# Altium PCB rev1_0.PcbDoc (part 1 of 2)
Units mm, origin at the board's own origin, x right, y up, seen from the top; angles counter-clockwise.
Board outline 99 x 99 mm, 2 copper layers (Top Layer, Bottom Layer); 120 components, 97 nets, 460 pads, 103 vias.
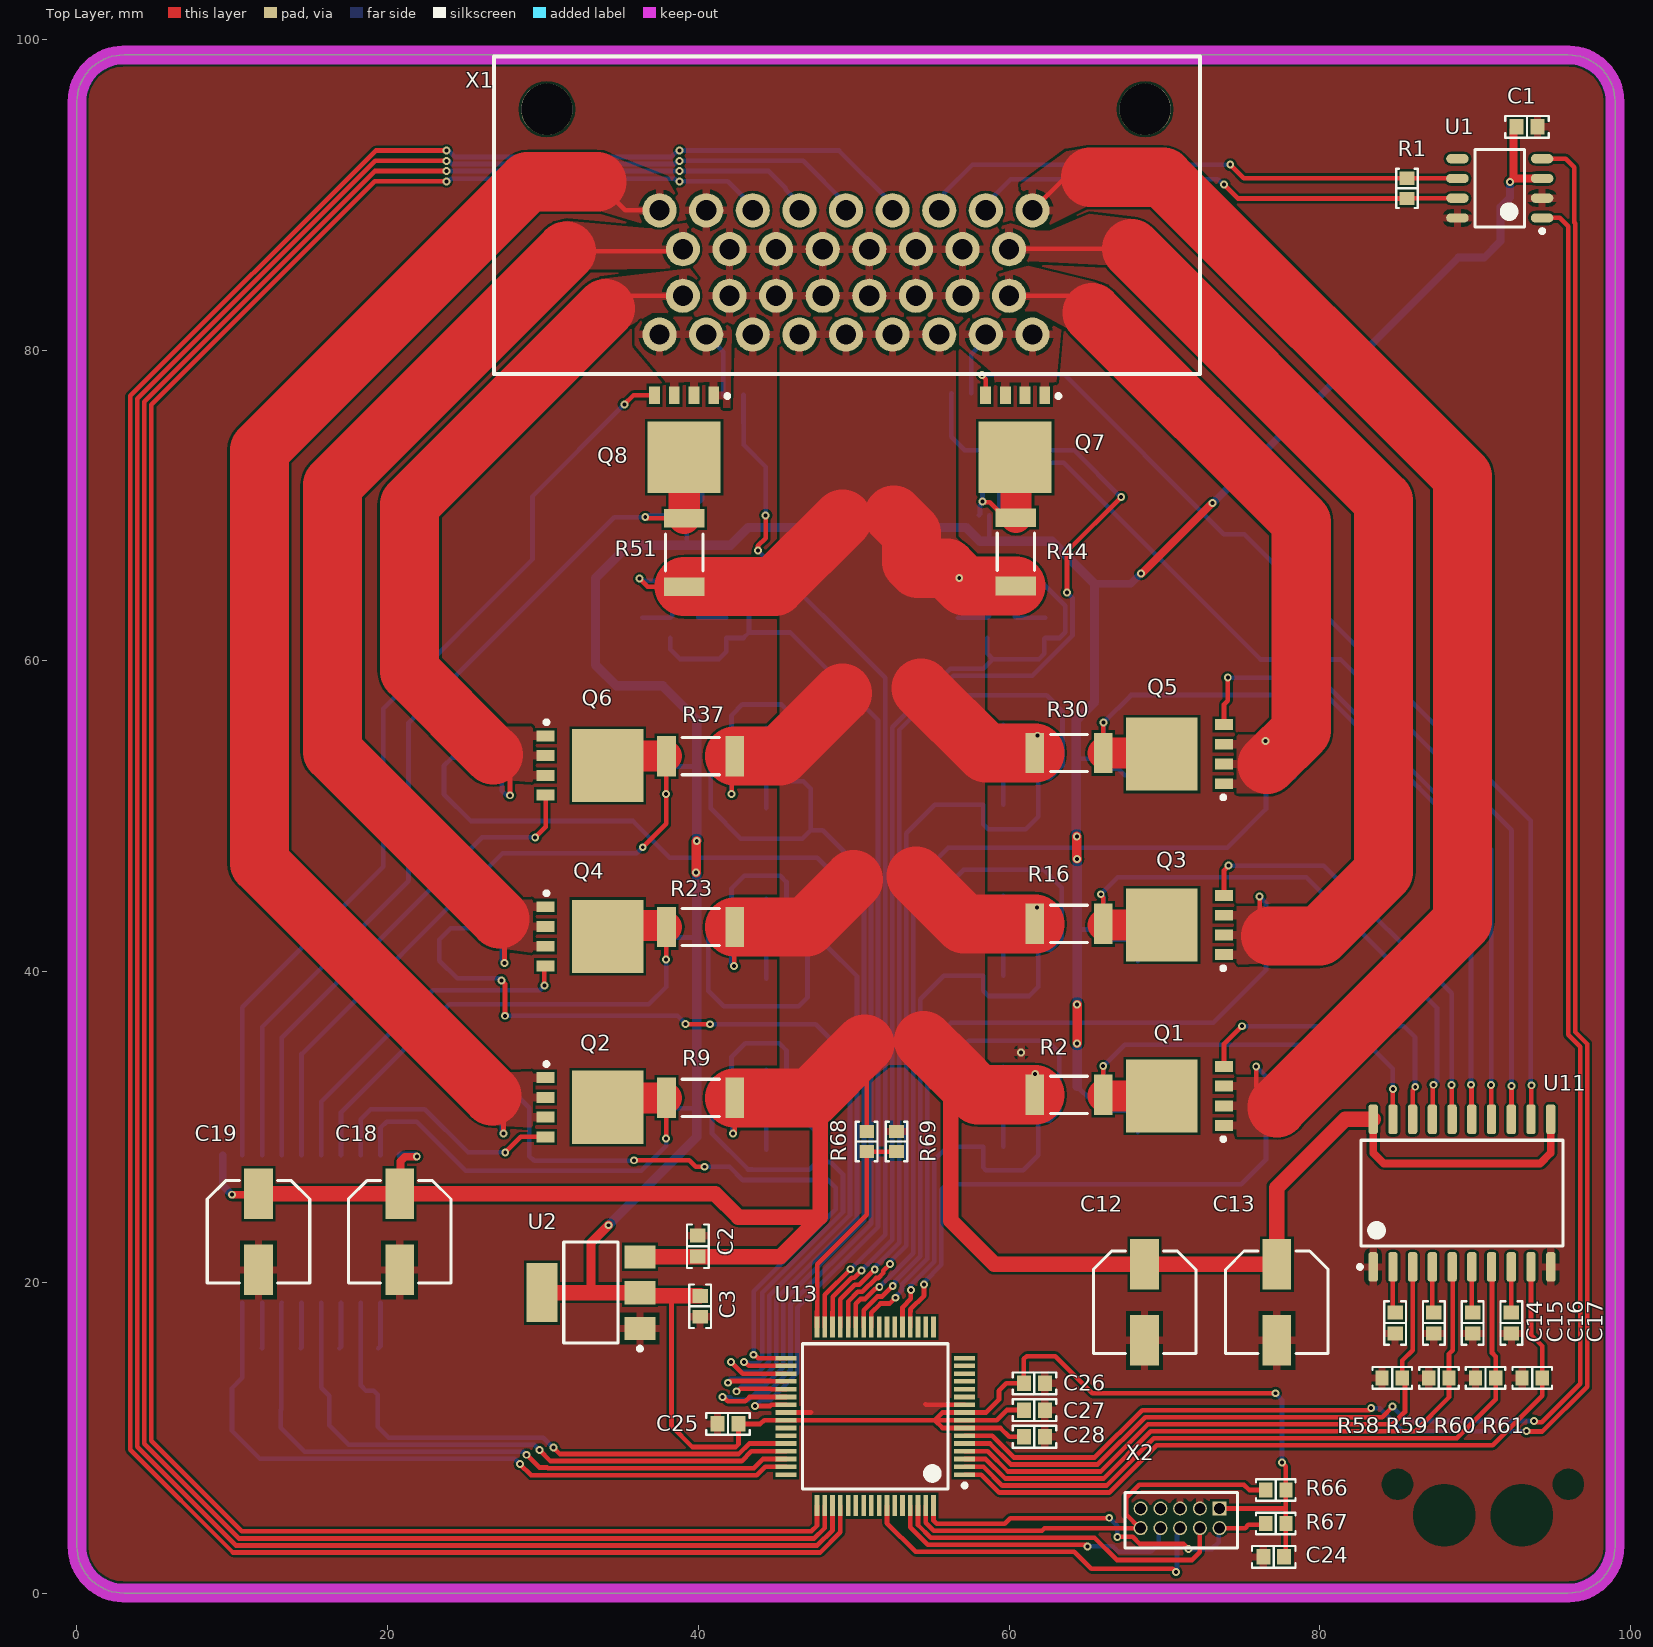
[diagram p0: Top Layer view]
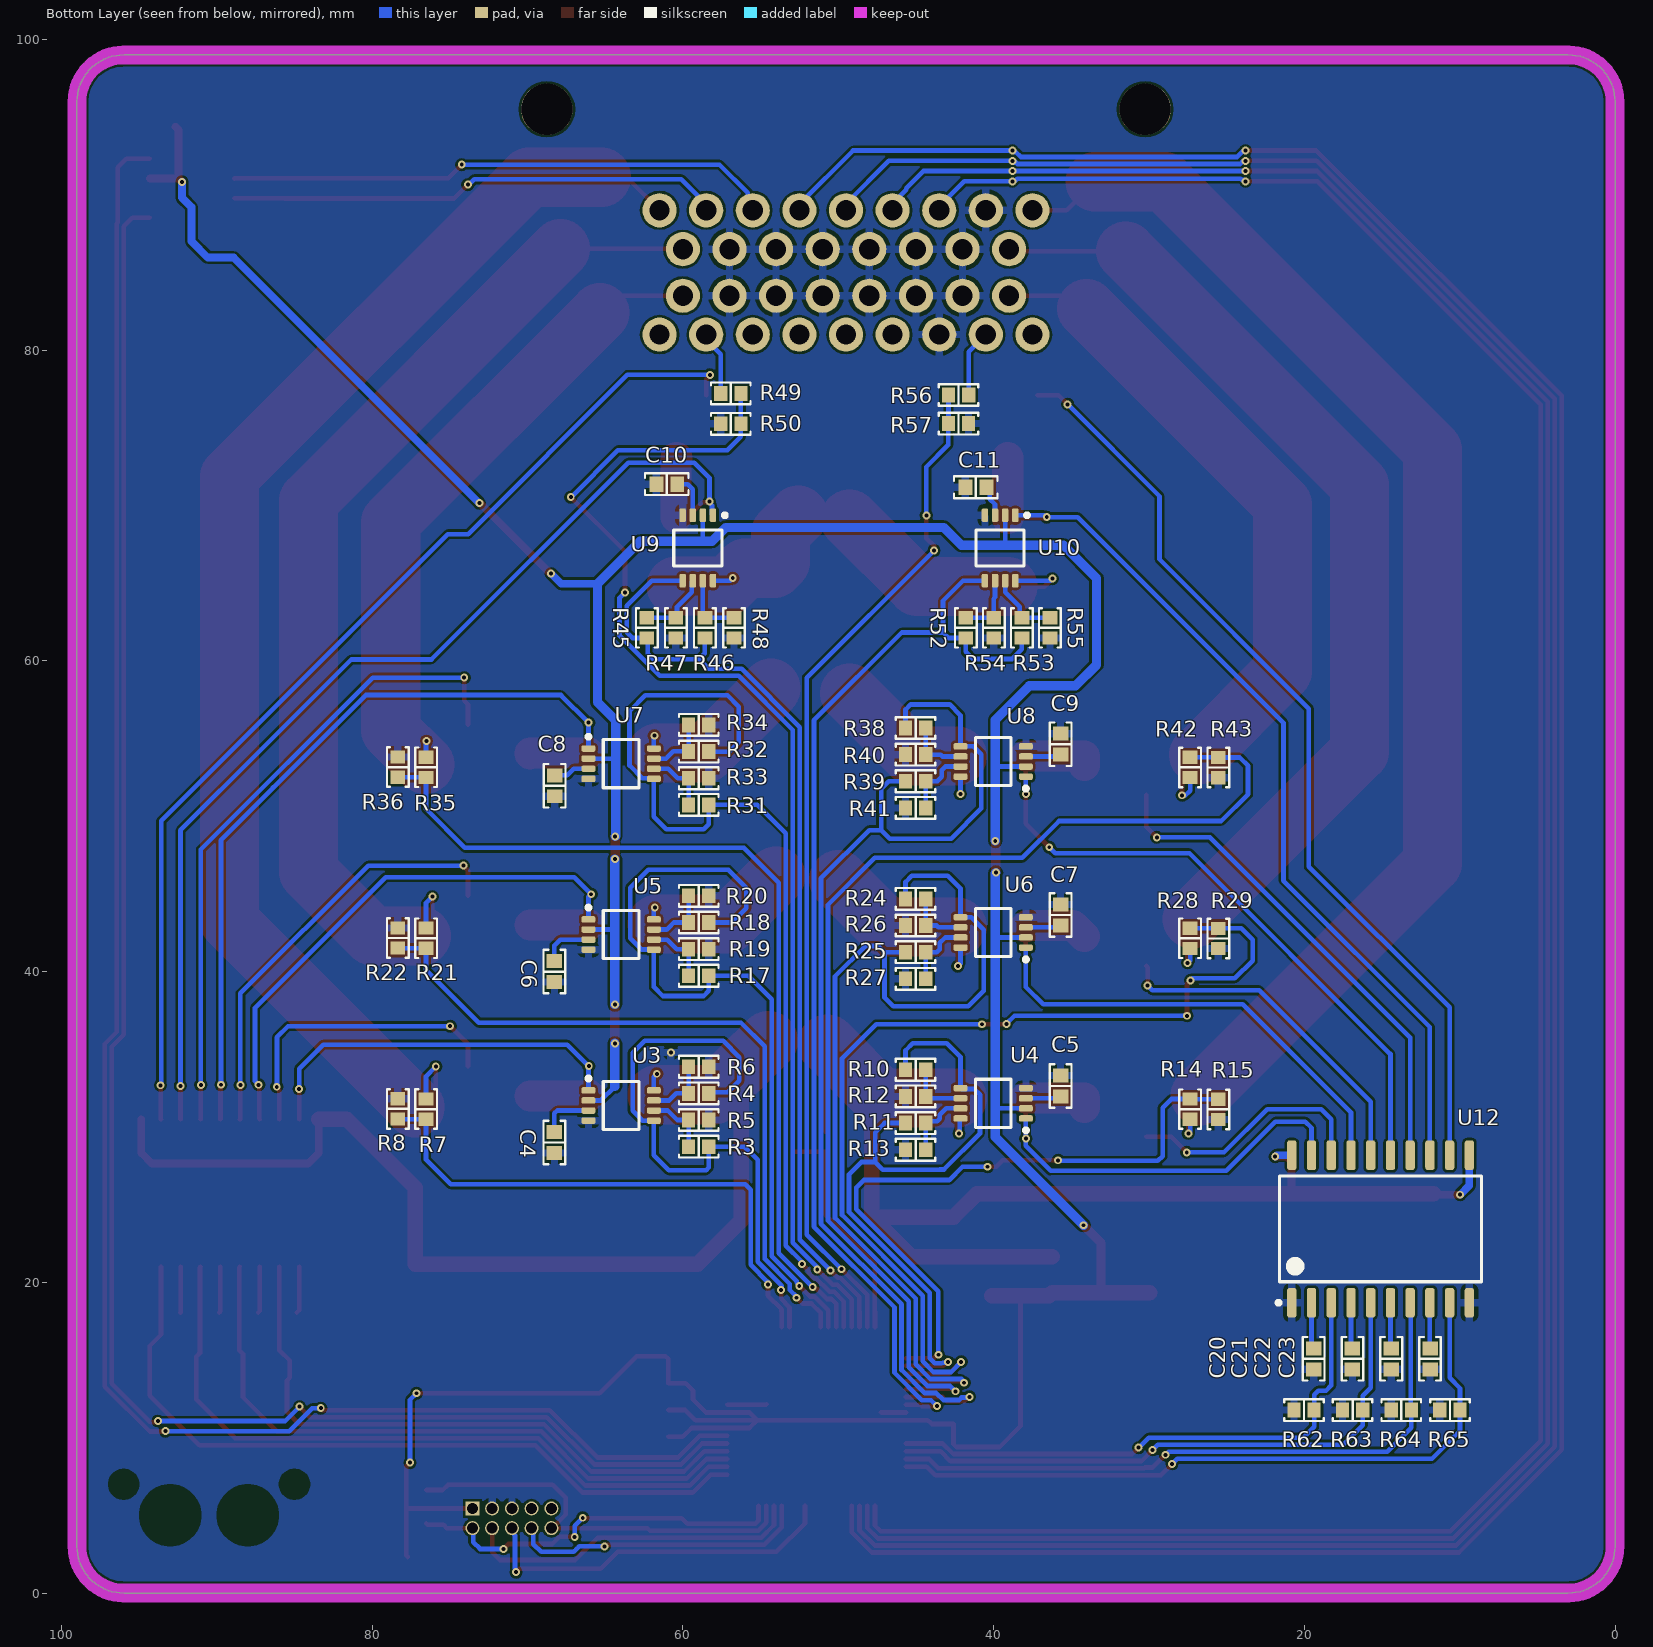
[diagram p1: Bottom Layer view, seen from below]
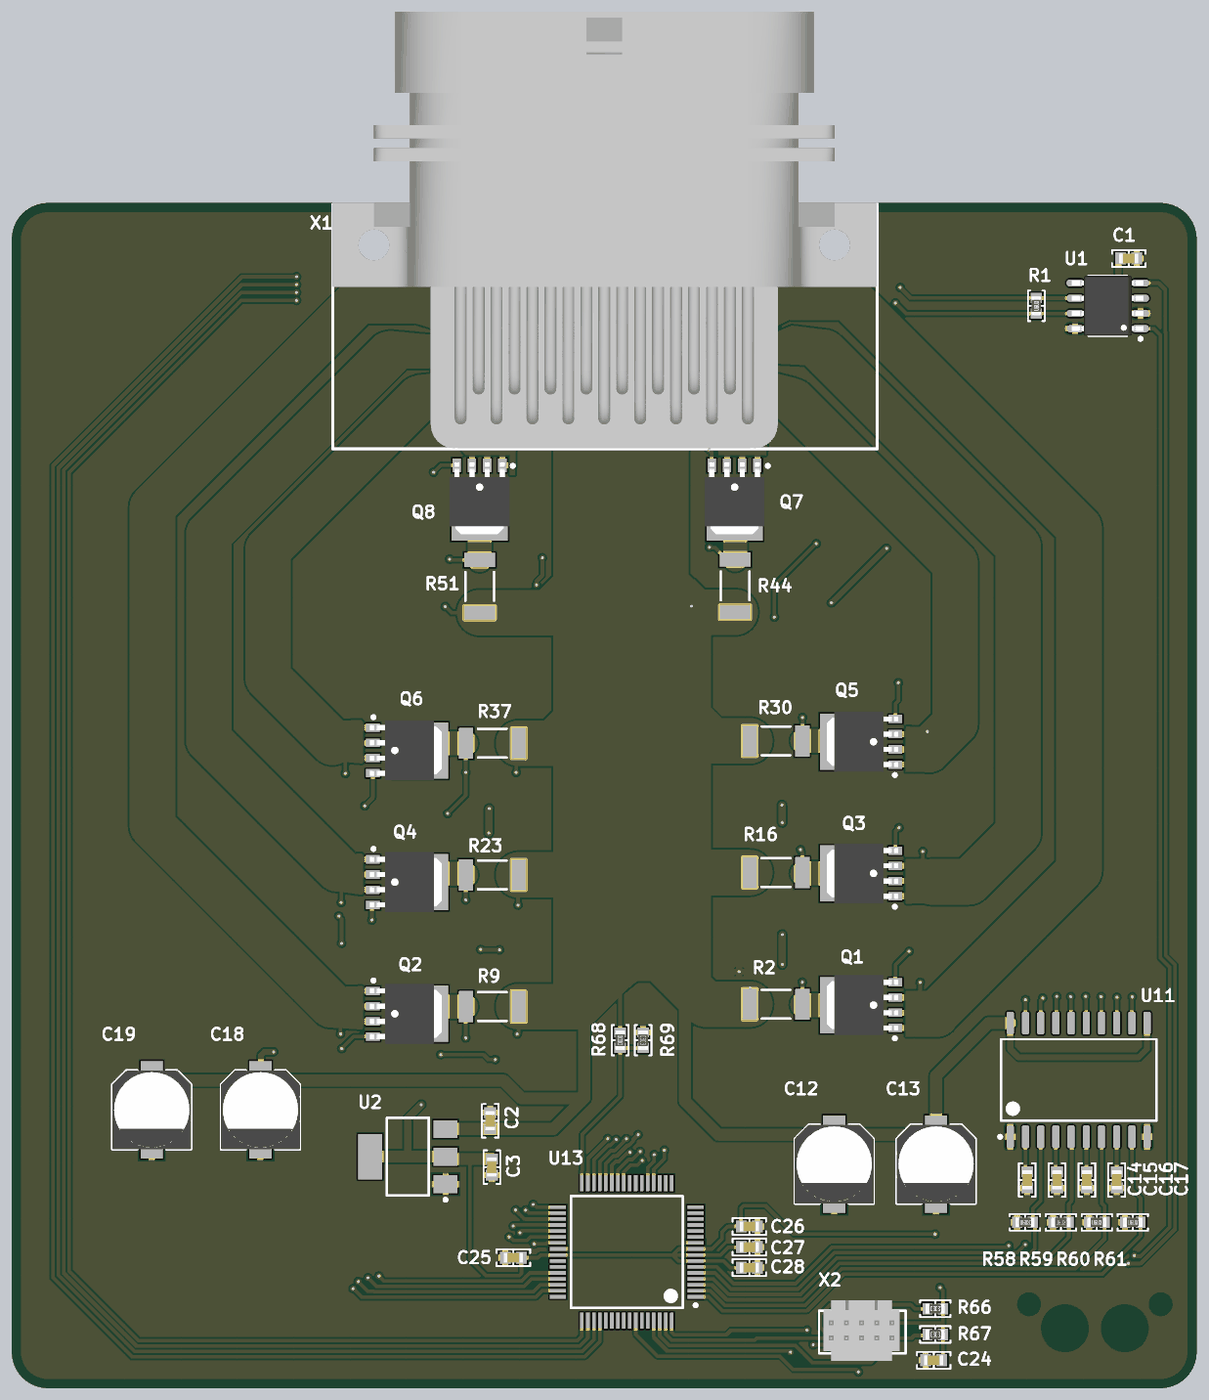
[diagram p3: 3D render of the assembled board from above, using the file's embedded part models]
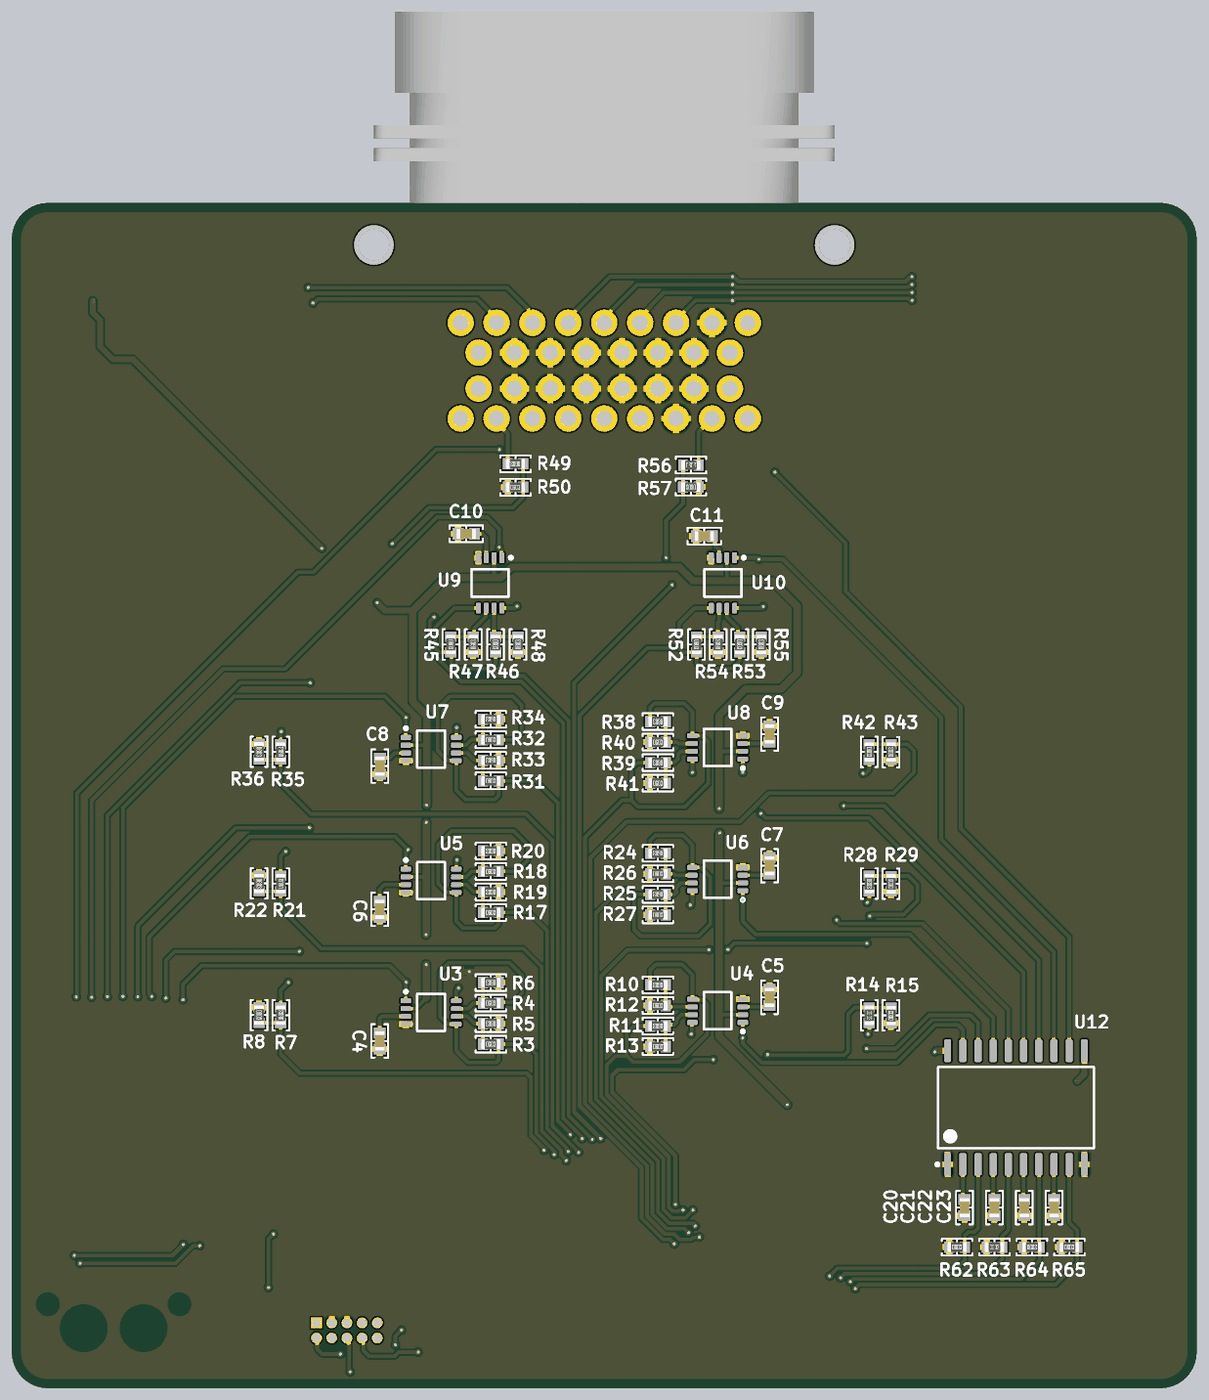
[diagram p4: 3D render of the assembled board from below, using the file's embedded part models]

## Layer stack, top to bottom
Top Solder: solder mask 0.0102, Solder Resist, Dk 3.5
Top Layer: signal copper 0.0356
Dielectric 1: dielectric 0.32, FR-4, Dk 4.8
Bottom Layer: signal copper 0.0356
Bottom Solder: solder mask 0.0102, Solder Resist, Dk 3.5

## Board outline
0,3 0,96 cw(c3,96) 3,99 96,99 cw(c96,96) 99,96 99,3 cw(c96,3) 96,0 3,0 cw(c3,3)

## Design rules (kind name [scope] priority, off if disabled: settings)
Clearance [InNetClass('All Nets')] p1: gap=0.152 ignorepadtopadclearanceinfootprint=FALSE
ComponentClearance [All] p1: gap=0.254 collisioncheckmode=3 verticalgap=2540 showdistances=FALSE
FabricationTestPointUsage TestPointUsage [All] p1: valid=0 allowmultiple=FALSE
FabricationTestpoint Testpoint [All] p1: side=3 testpointundercomponent=TRUE minsize=1.016 maxsize=2.54 preferedsize=1.524 minholesize=0.508 maxholesize=1.016 preferedholesize=0.813 testpointgrid=0.025 allowsidetop=TRUE allowsidebottom=TRUE usegrid=TRUE gridtolerance=0
Height [All] p1: minheight=0 maxheight=100 prefheight=12.7
HoleSize [All] p1: absolutevalues=TRUE maxlimit=6.274 minlimit=0.254 maxpercent=80.000 minpercent=20.000
PasteMaskExpansion PasteMaskExpansion_1 [InComponent('P1')] p1: expansion=-3.81
PasteMaskExpansion [All] p2: expansion=0
PlaneClearance [All] p1: clearance=0.127
PlaneConnect [All] p1: planeconnectstyle=Relief reliefexpansion=0.381 reliefentries=4 reliefconductorwidth=0.254 reliefairgap=0.254
PolygonConnect [All] p1: connectstyle=Relief reliefconductorwidth=0.5 reliefentries=4 polygonreliefangle="90 Angle" airgapwidth=0.254
RoomDefinition Switch42 [InComponentClass('Switch42')] p1 off: confinementstyle=ConfineIn formatcopy=TRUE lockcomponents=FALSE outline 29.832,57.552 48.73,57.552 48.73,82.185 29.832,82.185
RoomDefinition Switch41 [InComponentClass('Switch41')] p2 off: confinementstyle=ConfineIn formatcopy=TRUE lockcomponents=FALSE outline 54.545,58.855 75.835,58.855 75.835,82.279 54.545,82.279
RoomDefinition Switch32 [InComponentClass('Switch32')] p3 off: confinementstyle=ConfineIn formatcopy=TRUE lockcomponents=FALSE outline 23,47.192 49.041,47.192 49.041,58 23,58
RoomDefinition Switch31 [InComponentClass('Switch31')] p4 off: confinementstyle=ConfineIn formatcopy=TRUE lockcomponents=FALSE outline 81,57.808 54.959,57.808 54.959,47 81,47
RoomDefinition Switch22 [InComponentClass('Switch22')] p5 off: confinementstyle=ConfineIn formatcopy=TRUE lockcomponents=FALSE outline 23,36.192 49.041,36.192 49.041,47 23,47
RoomDefinition Switch21 [InComponentClass('Switch21')] p6 off: confinementstyle=ConfineIn formatcopy=TRUE lockcomponents=FALSE outline 81,46.808 54.959,46.808 54.959,36 81,36
RoomDefinition Switch12 [InComponentClass('Switch12')] p7 off: confinementstyle=ConfineIn formatcopy=TRUE lockcomponents=FALSE outline 23,25.192 49.041,25.192 49.041,36 23,36
RoomDefinition Switch11 [InComponentClass('Switch11')] p8 off: confinementstyle=ConfineIn formatcopy=TRUE lockcomponents=FALSE outline 81,35.808 54.959,35.808 54.959,25 81,25
RoomDefinition RightSwitches [InComponentClass('RightSwitches')] p9 off: confinementstyle=ConfineIn formatcopy=TRUE lockcomponents=FALSE outline 3.48,1.377 42.188,1.377 42.188,40.084 3.48,40.084
RoomDefinition LeftSwitches [InComponentClass('LeftSwitches')] p10 off: confinementstyle=ConfineIn formatcopy=TRUE lockcomponents=FALSE outline 63.727,4.837 102.435,4.837 102.435,43.545 63.727,43.545
RoutingVias [All] p1: holewidth=0.381 width=0.762 viastyle="Through Hole" minholewidth=0.254 minwidth=0.508 maxholewidth=0.381 maxwidth=1.27
SilkToSolderMaskClearance SilkscreenOverComponentPads [IsPad] p1: minsilkscreentomaskgap=0.254 clearancetoexposedcopper=TRUE
SolderMaskExpansion [All] p1: expansion=0.127 istentingtop=FALSE
UnRoutedNet [All] p1: checkbadconnections=TRUE
Width [All] p1: maxlimit=3.81 minlimit=0.152 preferedwidth=0.254
20 further rules are at their usual default settings.

## Classes and differential pairs
channel class switches: LeftSwitches RightSwitches
channel class switch: Switch11 Switch12 Switch21 Switch22 Switch31 Switch32 Switch41 Switch42
component class Switch42: C11 Q8 R51 R52 R53 R54 R55 R56 R57 U10
component class Switch41: C10 Q7 R44 R45 R46 R47 R48 R49 R50 U9
component class Switch32: C9 Q6 R37 R38 R39 R40 R41 R42 R43 U8
component class Switch31: C8 Q5 R30 R31 R32 R33 R34 R35 R36 U7
component class Switch22: C7 Q4 R23 R24 R25 R26 R27 R28 R29 U6
component class Switch21: C6 Q3 R16 R17 R18 R19 R20 R21 R22 U5
component class Switch12: C5 Q2 R9 R10 R11 R12 R13 R14 R15 U4
component class Switch11: C4 Q1 R2 R3 R4 R5 R6 R7 R8 U3
component class RightSwitches: C18 C19 C20 C21 C22 C23 R62 R63 R64 R65 U12
component class LeftSwitches: C12 C13 C14 C15 C16 C17 R58 R59 R60 R61 U11

## Components (designator, comment, footprint, x,y, rotation, side; value= is the part's Value field where it differs from the comment)
C1 "Capacitor" 0603_CAP 93.334,94.372 r0 top value=.1u (schematic designator C15)
C2 "Capacitor" 0603_CAP 39.97,22.326 r270 top value=1u (schematic designator C6)
C3 "Capacitor" 0603_CAP 40.108,18.459 r90 top value=1u (schematic designator C7)
C4 "Capacitor" 0603_CAP 68.269,28.999 r90 bottom value=220p (schematic designator C5)
C5 "Capacitor" 0603_CAP 35.688,32.638 r270 bottom value=220p
C6 "Capacitor" 0603_CAP 68.269,39.999 r90 bottom value=220p (schematic designator C5)
C7 "Capacitor" 0603_CAP 35.688,43.638 r270 bottom value=220p (schematic designator C5)
C8 "Capacitor" 0603_CAP 68.25,51.962 r90 bottom value=220p (schematic designator C5)
C9 "Capacitor" 0603_CAP 35.688,54.638 r270 bottom value=220p (schematic designator C5)
C10 "Capacitor" 0603_CAP 61.037,71.373 r180 bottom value=220p (schematic designator C5)
C11 "Capacitor" 0603_CAP 41.144,71.174 r180 bottom value=220p (schematic designator C5)
C12 "UWT1H470MCL1GS" CAPAE6666X77M 68.719,18.715 r270 top value=47u (schematic designator C13)
C13 "UWT1H470MCL1GS" CAPAE6666X77M 77.232,18.714 r270 top value=47u (schematic designator C14)
C14 "Capacitor" 0603_CAP 84.844,17.384 r90 top value=.1u (schematic designator C1)
C15 "Capacitor" 0603_CAP 87.34,17.384 r90 top value=.1u (schematic designator C2)
C16 "Capacitor" 0603_CAP 89.835,17.384 r90 top value=.1u (schematic designator C3)
C17 "Capacitor" 0603_CAP 92.331,17.384 r90 top value=.1u (schematic designator C4)
C18 "UWT1H470MCL1GS" CAPAE6666X77M 20.77,23.247 r270 top value=47u (schematic designator C13)
C19 "UWT1H470MCL1GS" CAPAE6666X77M 11.683,23.247 r270 top value=47u (schematic designator C14)
C20 "Capacitor" 0603_CAP 19.396,15.077 r90 bottom value=.1u (schematic designator C1)
C21 "Capacitor" 0603_CAP 16.9,15.077 r90 bottom value=.1u (schematic designator C2)
C22 "Capacitor" 0603_CAP 14.404,15.077 r90 bottom value=.1u (schematic designator C3)
C23 "Capacitor" 0603_CAP 11.909,15.077 r90 bottom value=.1u (schematic designator C4)
C24 "Capacitor" 0603_CAP 77.033,2.324 r0 top value=.1u (schematic designator C8)
C25 "Capacitor" 0603_CAP 41.906,10.885 r0 top value=.1u (schematic designator C9)
C26 "Capacitor" 0603_CAP 61.623,13.496 r180 top value=.1u (schematic designator C10)
C27 "Capacitor" 0603_CAP 61.623,11.777 r180 top value=.1u (schematic designator C11)
C28 "Capacitor" 0603_CAP 61.623,10.059 r180 top value=.1u (schematic designator C12)
Q1 "PSMN2R2-25YLC" LFPAK-SO8 71.134,31.994 r180 top
Q2 "PSMN2R2-25YLC" LFPAK-SO8 32.866,31.268 r0 top (schematic designator Q1)
Q3 "PSMN2R2-25YLC" LFPAK-SO8 71.134,42.994 r180 top (schematic designator Q1)
Q4 "PSMN2R2-25YLC" LFPAK-SO8 32.866,42.268 r0 top (schematic designator Q1)
Q5 "PSMN2R2-25YLC" LFPAK-SO8 71.134,53.994 r180 top (schematic designator Q1)
Q6 "PSMN2R2-25YLC" LFPAK-SO8 32.866,53.268 r0 top (schematic designator Q1)
Q7 "PSMN2R2-25YLC" LFPAK-SO8 60.391,74.397 r270 top (schematic designator Q1)
Q8 "PSMN2R2-25YLC" LFPAK-SO8 39.083,74.397 r270 top (schematic designator Q1)
R1 "Resistor" 0603_RES 85.607,90.416 r90 top value=120 (schematic designator R12)
R2 "Resistor" 2010 63.856,32.067 r180 top value=0 (schematic designator R5)
R3 "Resistor" 0603_RES 58.982,28.73 r180 bottom value=0 (schematic designator R6)
R4 "Resistor" 0603_RES 58.982,32.161 r180 bottom value=0 (schematic designator R7)
R5 "Resistor" 0603_RES 58.982,30.446 r0 bottom value=0 (schematic designator R8)
R6 "Resistor" 0603_RES 58.982,33.877 r0 bottom value=0 (schematic designator R9)
R7 "Resistor" 0603_RES 76.53,31.149 r90 bottom value=22k (schematic designator R10)
R8 "Resistor" 0603_RES 78.346,31.163 r270 bottom value=10k (schematic designator R11)
R9 "Resistor" 2010 40.144,31.871 r0 top value=0 (schematic designator R5)
R10 "Resistor" 0603_RES 45.018,33.681 r0 bottom value=0 (schematic designator R6)
R11 "Resistor" 0603_RES 45.018,30.25 r0 bottom value=0 (schematic designator R7)
R12 "Resistor" 0603_RES 45.018,31.965 r180 bottom value=0 (schematic designator R8)
R13 "Resistor" 0603_RES 45.018,28.534 r180 bottom value=0 (schematic designator R9)
R14 "Resistor" 0603_RES 27.352,31.145 r270 bottom value=22k (schematic designator R10)
R15 "Resistor" 0603_RES 25.536,31.131 r90 bottom value=10k (schematic designator R11)
R16 "Resistor" 2010 63.856,43.067 r180 top value=0 (schematic designator R5)
R17 "Resistor" 0603_RES 58.982,39.73 r180 bottom value=0 (schematic designator R6)
R18 "Resistor" 0603_RES 58.982,43.161 r180 bottom value=0 (schematic designator R7)
R19 "Resistor" 0603_RES 58.982,41.446 r0 bottom value=0 (schematic designator R8)
R20 "Resistor" 0603_RES 58.982,44.877 r0 bottom value=0 (schematic designator R9)
R21 "Resistor" 0603_RES 76.53,42.149 r90 bottom value=22k (schematic designator R10)
R22 "Resistor" 0603_RES 78.346,42.163 r270 bottom value=10k (schematic designator R11)
R23 "Resistor" 2010 40.144,42.871 r0 top value=0 (schematic designator R5)
R24 "Resistor" 0603_RES 45.018,44.681 r0 bottom value=0 (schematic designator R6)
R25 "Resistor" 0603_RES 45.018,41.25 r0 bottom value=0 (schematic designator R7)
R26 "Resistor" 0603_RES 45.018,42.965 r180 bottom value=0 (schematic designator R8)
R27 "Resistor" 0603_RES 45.018,39.534 r180 bottom value=0 (schematic designator R9)
R28 "Resistor" 0603_RES 27.352,42.145 r270 bottom value=22k (schematic designator R10)
R29 "Resistor" 0603_RES 25.536,42.131 r90 bottom value=10k (schematic designator R11)
R30 "Resistor" 2010 63.856,54.067 r180 top value=0 (schematic designator R5)
R31 "Resistor" 0603_RES 58.982,50.73 r180 bottom value=0 (schematic designator R6)
R32 "Resistor" 0603_RES 58.982,54.161 r180 bottom value=0 (schematic designator R7)
R33 "Resistor" 0603_RES 58.982,52.446 r0 bottom value=0 (schematic designator R8)
R34 "Resistor" 0603_RES 58.982,55.877 r0 bottom value=0 (schematic designator R9)
R35 "Resistor" 0603_RES 76.53,53.149 r90 bottom value=22k (schematic designator R10)
R36 "Resistor" 0603_RES 78.346,53.163 r270 bottom value=10k (schematic designator R11)
R37 "Resistor" 2010 40.144,53.871 r0 top value=0 (schematic designator R5)
R38 "Resistor" 0603_RES 45.018,55.681 r0 bottom value=0 (schematic designator R6)
R39 "Resistor" 0603_RES 45.018,52.25 r0 bottom value=0 (schematic designator R7)
R40 "Resistor" 0603_RES 45.018,53.965 r180 bottom value=0 (schematic designator R8)
R41 "Resistor" 0603_RES 45.018,50.534 r180 bottom value=0 (schematic designator R9)
R42 "Resistor" 0603_RES 27.352,53.145 r270 bottom value=22k (schematic designator R10)
R43 "Resistor" 0603_RES 25.536,53.131 r90 bottom value=10k (schematic designator R11)
R44 "Resistor" 2010 60.439,67.017 r270 top value=0 (schematic designator R5)
R45 "Resistor" 0603_RES 62.322,62.125 r270 bottom value=0 (schematic designator R6)
R46 "Resistor" 0603_RES 58.581,62.125 r270 bottom value=0 (schematic designator R7)
R47 "Resistor" 0603_RES 60.451,62.125 r90 bottom value=0 (schematic designator R8)
R48 "Resistor" 0603_RES 56.711,62.125 r90 bottom value=0 (schematic designator R9)
R49 "Resistor" 0603_RES 56.917,77.218 r0 bottom value=22k (schematic designator R10)
R50 "Resistor" 0603_RES 56.917,75.26 r180 bottom value=10k (schematic designator R11)
R51 "Resistor" 2010 39.091,66.977 r270 top value=0 (schematic designator R5)
R52 "Resistor" 0603_RES 41.786,62.125 r270 bottom value=0 (schematic designator R6)
R53 "Resistor" 0603_RES 38.18,62.125 r270 bottom value=0 (schematic designator R7)
R54 "Resistor" 0603_RES 39.983,62.125 r90 bottom value=0 (schematic designator R8)
R55 "Resistor" 0603_RES 36.377,62.125 r90 bottom value=0 (schematic designator R9)
R56 "Resistor" 0603_RES 42.255,77.111 r180 bottom value=22k (schematic designator R10)
R57 "Resistor" 0603_RES 42.259,75.276 r0 bottom value=10k (schematic designator R11)
R58 "Resistor" 0603_RES 84.658,13.849 r0 top value=10k (schematic designator R1)
R59 "Resistor" 0603_RES 87.662,13.849 r0 top value=10k (schematic designator R2)
R60 "Resistor" 0603_RES 90.666,13.849 r0 top value=10k (schematic designator R3)
R61 "Resistor" 0603_RES 93.67,13.849 r0 top value=10k (schematic designator R4)
R62 "Resistor" 0603_RES 20.02,11.777 r180 bottom value=10k (schematic designator R1)
R63 "Resistor" 0603_RES 16.89,11.777 r180 bottom value=10k (schematic designator R2)
R64 "Resistor" 0603_RES 13.759,11.777 r180 bottom value=10k (schematic designator R3)
R65 "Resistor" 0603_RES 10.628,11.777 r180 bottom value=10k (schematic designator R4)
R66 "Resistor" 0603_RES 77.163,6.63 r0 top value=10k (schematic designator R13)
R67 "Resistor" 0603_RES 77.163,4.477 r0 top value=10k (schematic designator R14)
R68 "Resistor" 0603_RES 50.833,29.062 r90 top value=22k (schematic designator R15)
R69 "Resistor" 0603_RES 52.75,29.062 r270 top value=10k (schematic designator R16)
U1 "MCP2561/2FD" SOIC-8 91.581,90.416 r180 top (schematic designator U4)
U2 "NCP1117ST50T3G" SOT-223-4 33.085,19.332 r180 top (schematic designator U3)
U3 "LT6100" MSOP-8 63.973,31.382 r180 bottom (schematic designator U2)
U4 "LT6100" MSOP-8 40.027,31.521 r0 bottom (schematic designator U2)
U5 "LT6100" MSOP-8 63.973,42.382 r180 bottom (schematic designator U2)
U6 "LT6100" MSOP-8 40.027,42.521 r0 bottom (schematic designator U2)
U7 "LT6100" MSOP-8 63.973,53.382 r180 bottom (schematic designator U2)
U8 "LT6100" MSOP-8 40.027,53.521 r0 bottom (schematic designator U2)
U9 "LT6100" MSOP-8 59.039,67.267 r270 bottom (schematic designator U2)
U10 "LT6100" MSOP-8 39.583,67.267 r270 bottom (schematic designator U2)
U11 "LT1161" SO-20 89.148,25.741 r90 top (schematic designator U1)
U12 "LT1161" SO-20 15.092,23.434 r90 bottom (schematic designator U1)
U13 "MKE18F512VLH16" TQFP64 51.384,11.372 r180 top (schematic designator U5)
X1 "6437288-1" 6437288-1 61.5,81 r180 top (schematic designator X2)
X2 "2x5 1.27mm" "2x5 1.27mm th" 73.546,4.176 r180 top (schematic designator X1)

## Footprints (in the part's own frame and the unit in brackets; to place one, negate y for a bottom-side part, rotate by r counter-clockwise, add the part's x,y. Pads: shape width x height; smd on the part's side, far side on the other; paste and mask are expansions set on the pad)
"2x5 1.27mm th" [mm]
  rect 0.9x0.9 hole 0.71: 1(0,-1.27)
  round 0.9 hole 0.71: 2(0,0) 3(1.27,-1.27) 4(1.27,0) 5(2.54,-1.27) 6(2.54,0) 7(3.81,-1.27) 8(3.81,0) 9(5.08,-1.27) 10(5.08,0)
  silkscreen extent -1.14,-2.29 6.1,1.27, body extent -0.64,-3.17 5.71,1.91, height 5.71
0603_CAP [mm]
  rect 0.9x1 smd: 1(-0.675,0) 2(0.675,0)
  silkscreen extent -1.4,-0.7 1.4,0.7, body extent -0.8,-0.41 0.8,0.41, height 0.82
0603_RES [mm] "Chip Resistor, 2-Leads, Body 1.60x0.80mm, IPC Medium Density"
  rect 0.85x0.95 smd: 1(-0.65,0) 2(0.65,0)
  silkscreen extent -1.27,-0.7 1.27,0.7, body extent -0.8,-0.4 0.8,0.4, height 0.45
2010 [mm] "Chip Resistor, Body 5.0x2.5mm, IPC High Density"
  rect 1.2x2.6 smd: 1(-2.2,0) 2(2.2,0)
  silkscreen extent -1.2,-1.2 1.2,1.2, body extent -2.58,-1.33 2.58,1.33, height 0.9
6437288-1 [mm]
  round 2.2 hole 1.3: A1(0,0) A2(3,0) A3(6,0) A4(9,0) A5(12,0) A6(15,0) A7(18,0) A8(21,0) A9(24,0) A10(1.5,-2.5) A11(4.5,-2.5) A12(7.5,-2.5) A13(10.5,-2.5) A14(13.5,-2.5) A15(16.5,-2.5) A16(19.5,-2.5) A17(22.5,-2.5) A18(1.5,-5.5) A19(4.5,-5.5) A20(7.5,-5.5) A21(10.5,-5.5) A22(13.5,-5.5) A23(16.5,-5.5) A24(19.5,-5.5) A25(22.5,-5.5) A26(0,-8) A27(3,-8) A28(6,-8) A29(9,-8) A30(12,-8) A31(15,-8) A32(18,-8) A33(21,-8) A34(24,-8)
  round 3.3 hole 3.3 unplated: MH(-7.25,-14.5) MH(31.25,-14.5)
  silkscreen extent -10.79,-17.91 34.67,2.54, body extent -10.75,-34 34.75,2.5, height 28.16
CAPAE6666X77M [mm] "Aluminum Electrolytic Capacitor, Body 6.60x6.60x7.70mm, IPC Low Density"
  rect 3.25x1.85 smd: 1(-2.45,0) 2(2.45,0)
  silkscreen extent -3.3,-3.3 3.3,3.3, body extent -3.3,-3.3 3.3,3.3, height 7.7
LFPAK-SO8 [mm] "TO, 5-Pads, Body 5.15x5.86mm (max), IPC Low Density"
  rect 1.15x0.7 smd: 1(-2.7,1.905) 2(-2.7,0.635) 3(-2.7,-0.635) 4(-2.7,-1.905)
  rect 4.6x4.7 smd: 5(1.3,0)
  silkscreen extent -2.78,2.66 -2.53,2.9, body extent -2.95,-2.5 3.05,2.5, height 1.25
MSOP-8 [mm] "MSOP, 8-Leads, Body 3.00x3.00mmPitch 0.65mm, IPC MSOP65P490X110-8N, Medium Density, LTC2053, AD8495, LT6100HMS8PBF"
  rrect50% 0.889x0.42 smd: 1(-2.105,0.975) 2(-2.105,0.325) 3(-2.105,-0.325) 4(-2.105,-0.975) 5(2.105,-0.975) 6(2.105,-0.325) 7(2.105,0.325) 8(2.105,0.975)
  silkscreen extent -2.23,-1.55 1.15,1.86, body extent -1.55,-1.55 1.55,1.55, height 1.1
SO-20 [mm] "LT1161ISWPBF"
  rrect50% 1.9x0.6 smd: 1(-4.75,5.715) 2(-4.75,4.445) 3(-4.75,3.175) 4(-4.75,1.905) 5(-4.75,0.635) 6(-4.75,-0.635) 7(-4.75,-1.905) 8(-4.75,-3.175) 9(-4.75,-4.445) 10(-4.75,-5.715) 11(4.75,-5.715) 12(4.75,-4.445) 13(4.75,-3.175) 14(4.75,-1.905) 15(4.75,-0.635) 16(4.75,0.635) 17(4.75,1.905) 18(4.75,3.175) 19(4.75,4.445) 20(4.75,5.715)
  silkscreen extent -4.87,-6.5 3.4,6.69, body extent -3.8,-6.5 3.8,6.5, height 2.65
SOIC-8 [mm] "SOIC, 8-Leads, Body 4.90x3.90mm, Pitch 1.27mm, IPC Medium Density"
  oval 1.45x0.6 smd: 1(-2.725,1.905) 2(-2.725,0.635) 3(-2.725,-0.635) 4(-2.725,-1.905) 5(2.725,-1.905) 6(2.725,-0.635) 7(2.725,0.635) 8(2.725,1.905)
  silkscreen extent -2.85,-2.5 1.6,2.88, body extent -3,-2.5 3,2.5, height 1.75
SOT-223-4 [mm] "SOT223, 4-Leads, Body 6.5x3.5mm, Pitch 2.3mm"
  rect 2x1.5 smd: 1(-3.15,2.3) 2(-3.15,0) 3(-3.15,-2.3)
  rect 2x3.8 smd: 4(3.15,0)
  silkscreen extent -3.27,-3.25 1.75,3.72, body extent -1.75,-3.25 1.75,3.25, height 1.75
TQFP64 [mm] "TSQFP, 64-Leads, Body 10.00x10.00mm, Pitch 0.50mm, IPC Medium Density, MKE18F512VLH16"
  rect 1.35x0.3 smd: 1(-5.75,3.75) 2(-5.75,3.25) 3(-5.75,2.75) 4(-5.75,2.25) 5(-5.75,1.75) 6(-5.75,1.25) 7(-5.75,0.75) 8(-5.75,0.25) 9(-5.75,-0.25) 10(-5.75,-0.75) 11(-5.75,-1.25) 12(-5.75,-1.75) 13(-5.75,-2.25) 14(-5.75,-2.75) 15(-5.75,-3.25) 16(-5.75,-3.75) 33(5.75,-3.75) 34(5.75,-3.25) 35(5.75,-2.75) 36(5.75,-2.25) 37(5.75,-1.75) 38(5.75,-1.25) 39(5.75,-0.75) 40(5.75,-0.25) 41(5.75,0.25) 42(5.75,0.75) 43(5.75,1.25) 44(5.75,1.75) 45(5.75,2.25) 46(5.75,2.75) 47(5.75,3.25) 48(5.75,3.75)
  rect 0.3x1.35 smd: 17(-3.75,-5.75) 18(-3.25,-5.75) 19(-2.75,-5.75) 20(-2.25,-5.75) 21(-1.75,-5.75) 22(-1.25,-5.75) 23(-0.75,-5.75) 24(-0.25,-5.75) 25(0.25,-5.75) 26(0.75,-5.75) 27(1.25,-5.75) 28(1.75,-5.75) 29(2.25,-5.75) 30(2.75,-5.75) 31(3.25,-5.75) 32(3.75,-5.75) 49(3.75,5.75) 50(3.25,5.75) 51(2.75,5.75) 52(2.25,5.75) 53(1.75,5.75) 54(1.25,5.75) 55(0.75,5.75) 56(0.25,5.75) 57(-0.25,5.75) 58(-0.75,5.75) 59(-1.25,5.75) 60(-1.75,5.75) 61(-2.25,5.75) 62(-2.75,5.75) 63(-3.25,5.75) 64(-3.75,5.75)
  silkscreen extent -5.88,-4.67 4.67,4.68, body extent -5,-5 5,5, height 1.6

## Part data
C12 C13 C18 C19: "CAP ALUM 47UF 20% 50V SMD", Dielectric="Aluminum Electrolytic", percent tolerance=20%, Vmax=50
Q1 Q2 Q3 Q4 Q5 Q6 Q7 Q8: "N-channel 25 V 2.4 mΩ logic level MOSFET in LFPAK using NextPower", ComponentLink1Description=Datasheet, ComponentLink1URL=https://assets.nexperia.com/documents/data-sheet/PSMN2R2-25YLC.pdf, ComponentLink2Description=Digikey, ComponentLink2URL=https://www.digikey.com/product-detail/en/nexperia-usa-inc/PSMN2R2-25YLC115/1727-5299-1-ND/2674299, IdsMax=100, name=PSMN2R2-25YLC, RdsOnMax=3.15m, Type=N, vdsmax=25, vgsmax=20, vt=1.54
U1: "1/1 Transceiver CANbus", ComponentLink1Description=Digikey, ComponentLink1URL=https://www.digikey.com/product-detail/en/microchip-technology/MCP2561FDT-E-SN/MCP2561FDT-E-SNCT-ND/8637243, ComponentLink2Description=Datasheet, ComponentLink2URL=http://ww1.microchip.com/downloads/en/DeviceDoc/20005284A.pdf, name=MCP2561/2FD, Type=CAN, vcc=5
U3 U4 U5 U6 U7 U8 U9 U10: "High Side Current Sense Amp", ComponentLink1Description=Datasheet, ComponentLink1URL=https://www.analog.com/media/en/technical-documentation/data-sheets/6100fd.pdf, ComponentLink2Description=Digikey, ComponentLink2URL=https://www.digikey.com/product-detail/en/linear-technology-analog-devices/LT6100CMS8-TRPBF/LT6100CMS8-TRPBFCT-ND/7917234, name=LT6100
U13: package=TQFP64, vcc=2.7-5.5
X1: "Superseal 34P", Circuits=34, ComponentLink1Description=Digikey, ComponentLink1URL=https://www.digikey.com/products/en?mpart=6437288-1&&csp=WT.z_cid%3Dsp_8004_20120425_buynow%26TE_cid%3D8004-1541898693362, name=6437288-1
U2: ComponentLink1Description=Digikey, ComponentLink1URL=https://www.digikey.com/product-detail/en/on-semiconductor/NCP1117ST50T3G/NCP1117ST50T3GOSCT-ND/1967217, ComponentLink2Description=Datasheet, ComponentLink2URL=https://www.onsemi.com/pub/Collateral/NCP1117-D.PDF, name=NCP1117ST50T3G, Type="Linear fixed", Vout=5
U11 U12: ComponentLink1Description=Datasheet, ComponentLink1URL=https://www.analog.com/media/en/technical-documentation/data-sheets/1161fa.pdf, ComponentLink2Description=Digikey, ComponentLink2URL=https://www.digikey.com/product-detail/en/linear-technology-analog-devices/LT1161ISW-PBF/LT1161ISW-PBF-ND/888528, name=LT1161
X2: Circuits=10, ComponentLink1Description=Digikey, ComponentLink1URL=https://www.digikey.com/product-detail/en/samtec-inc/FTSH-105-01-F-D-K/SAM8909-ND/1850757, name="2x5 1.27mm"

## Via types
v1: diameter 0.508, hole 0.254, Top Layer to Bottom Layer, tented both sides, 103 vias

## Nets (pads, with @x,y where several pads share a name; then routed paths per layer and width w, separated by ;. In a path a pad name is that pad's centre, name@x,y a point inside that pad or via, vN(x,y) a via of type N, cw(c..) or ccw(c..) an arc to the next point about the centre after c; other vN are vias at no path point)
5V: C1.1 C3.2 C24.2 C25.2 C26.2 C27.2 C28.2 R66.2 R67.2 U1.3 U2.2 U2.4 U3.2 U4.2 U5.2 U6.2 U7.2 U8.2 U9.2 U10.2 U13.7 U13.8 U13.9 U13.41 X2.1 | length 272.2
  Top Layer w0.3: 38.271,19.134 38.271,10.743 39.614,9.4 42.406,9.4 42.581,9.576 C25.2@42.581,10.885 43.991,10.885 44.228,11.122 U13.41@45.634,11.122 55.213,11.122 ; C28.2@60.948,10.059 60.004,10.059 59.44,10.622 U13.7@57.134,10.622 55.713,10.622 55.213,11.122 ; C27.2@60.948,11.777 59.857,11.777 59.202,11.122 U13.8@57.134,11.122 55.213,11.122 ; X2.1@73.546,5.446 77.704,5.446 77.813,5.554 ; v1(77.143,12.859) 65.36,12.859 62.976,15.242 61.124,15.242 60.948,15.066 C26.2@60.948,13.496 59.823,13.496 59.344,13.016 59.344,12.444 58.522,11.622 U13.9@57.134,11.622 55.713,11.622 55.213,11.122 ; v1(77.563,8.397) 77.813,8.147 R66.2@77.813,6.63 77.813,5.554 ; C24.2@77.708,2.324 77.813,2.429 R67.2@77.813,4.477 77.813,5.554
  Top Layer w0.5: v1(68.48,65.611) 68.521,65.611 73.06,70.15 73.1,70.15 v1(73.102,70.152) ; v1(92.24,90.834) 92.242,90.834 92.46,91.051 ; C1.1@92.659,94.372 92.46,94.173 92.46,91.051 ; U1.3@94.306,91.051 92.46,91.051
  Top Layer w0.6: 33.085,19.332 33.085,22.548 v1(34.21,23.673) ; v1(39.853,46.371) 39.853,48.374 v1(39.892,48.413) ; v1(64.355,48.705) 64.355,47.273 v1(64.379,47.249) ; v1(64.379,35.383) v1(64.379,37.883)
  Top Layer w1: U2.4@29.935,19.332 33.085,19.332 U2.2@36.235,19.332 36.434,19.134 38.271,19.134 C3.2@40.108,19.134
  Bottom Layer w0.3: U4.2@37.921,31.196 39.857,31.196 39.892,31.231 ; U6.2@37.921,42.196 39.717,42.196 39.892,42.021 ; U8.2@37.921,53.196 39.858,53.196 39.892,53.163 ; 39.091,67.443 39.258,67.61 U10.2@39.258,69.373 ; U9.2@58.714,69.373 58.714,67.826 58.839,67.7 ; 64.33,53.627 64.411,53.707 U7.2@66.079,53.707 ; 64.379,32.602 65.273,31.707 U3.2@66.079,31.707 ; 64.379,42.596 64.49,42.707 U5.2@66.079,42.707 ; v1(77.143,12.859) 77.563,12.439 v1(77.563,8.397)
  Bottom Layer w0.5: 65.495,64.963 67.832,64.963 v1(68.48,65.611) ; v1(73.102,70.152) 88.908,85.958 90.574,85.958 91.631,87.014 91.631,89.208 92.24,89.818 v1(92.24,90.834)
  Bottom Layer w0.6: v1(34.21,23.673) 39.892,29.355 39.892,31.231 39.892,42.021 39.892,46.332 v1(39.853,46.371) ; v1(39.892,48.413) 39.892,53.163 39.892,56.195 37.696,58.391 34.73,58.391 33.381,59.74 33.381,65.326 35.498,67.443 39.091,67.443 42.066,67.443 43.211,68.588 57.241,68.588 58.128,67.7 58.839,67.7 62.757,67.7 65.495,64.963 65.495,57.343 64.33,56.179 64.33,53.627 64.33,48.729 v1(64.355,48.705) ; 64.379,32.602 v1(64.379,35.383) ; v1(64.379,37.883) 64.379,42.596 v1(64.379,47.249)
12V: C2.2 C12.1 C13.1 C18.1 C19.1 R2.2 R9.2 R16.2 R23.2 R30.2 R37.2 R44.2 R51.2 R68.2 U2.3 U3.8 U4.8 U5.8 U6.8 U7.8 U8.8 U9.8 U10.8 U11.11 U11.20 U12.11 U12.20 X1.A3 X1.A4 X1.A5 X1.A6 | length 230.3
  Top Layer w0.3: v1(36.215,65.29) 36.728,64.777 R51.2@39.091,64.777 ; v1(42.142,51.432) 42.142,53.669 R37.2@42.344,53.871 ; v1(42.228,29.579) 42.344,29.695 R9.2@42.344,31.871 ; v1(42.298,40.349) 42.298,42.825 R23.2@42.344,42.871 ; 50.702,35.33 50.833,35.199 R68.2@50.833,29.712
  Top Layer w0.5: v1(9.968,25.639) 11.625,25.639 C19.1@11.683,25.697 ; C18.1@20.77,25.697 20.824,25.751 20.824,27.796 21.117,28.089 21.872,28.089 v1(21.873,28.09) ; U11.20@83.433,30.491 83.433,28.327 84.114,27.646 94.178,27.646 94.863,28.33 U11.11@94.863,30.491
  Top Layer w1: C19.1@11.683,25.697 C18.1@20.77,25.697 41.074,25.697 42.572,24.199 47.83,24.199 ; U2.3@36.235,21.632 36.254,21.651 C2.2@39.97,21.651 45.281,21.651 47.83,24.199 ; 47.242,31.871 47.83,31.283 47.83,24.199 ; 56.245,33.818 56.245,23.973 59.052,21.165 C12.1@68.719,21.165 77.231,21.165 C13.1@77.232,21.164 77.232,26.099 81.624,30.491 U11.20@83.433,30.491
  Top Layer w3.81: R51.2@39.091,64.777 44.911,64.777 49.265,69.132 ; R9.2@42.344,31.871 47.242,31.871 50.702,35.33 ; R23.2@42.344,42.871 46.949,42.871 49.984,45.906 ; R37.2@42.344,53.871 45.218,53.871 49.265,57.918 ; 52.577,69.371 53.716,68.233 53.716,66.361 54.122,65.956 55.993,65.956 57.132,64.817 R44.2@60.439,64.817 ; 54.014,46.145 57.093,43.067 R16.2@61.656,43.067 ; 54.333,58.237 58.503,54.067 R30.2@61.656,54.067 ; 54.493,35.57 56.245,33.818 57.996,32.067 R2.2@61.656,32.067
  Bottom Layer w0.3: v1(36.215,65.29) 36.344,65.162 U10.8@38.608,65.162 ; U4.8@42.132,30.546 42.188,30.49 42.188,29.619 v1(42.228,29.579) ; U6.8@42.132,41.546 42.132,40.515 v1(42.298,40.349) ; U8.8@42.132,52.546 42.132,51.442 v1(42.142,51.432) ; v1(56.79,65.325) 56.954,65.162 U9.8@58.064,65.162 ; v1(61.679,33.422) 61.868,33.234 U3.8@61.868,32.357 ; v1(61.807,44.115) 61.868,44.055 U5.8@61.868,43.357 ; v1(61.836,55.184) 61.868,55.153 U7.8@61.868,54.357
  Bottom Layer w0.5: U12.11@9.377,28.184 9.377,26.23 v1(9.968,25.639) ; U12.20@20.807,28.184 21.777,28.184 21.871,28.09 v1(21.873,28.09)
CAN_N: R1.2 U1.6 X1.A28 | length 35.4
  Top Layer w0.3: v1(74.232,91.942) 75.109,91.066 R1.2@85.607,91.066 85.615,91.059 88.849,91.059 U1.6@88.856,91.051
  Bottom Layer w0.3: X1.A28@55.5,89 55.83,89.33 55.83,90.131 57.641,91.942 v1(74.232,91.942)
CAN_P: R1.1 U1.7 X1.A27 | length 31.9
  Top Layer w0.3: v1(73.835,90.653) 74.722,89.766 R1.1@85.607,89.766 85.615,89.774 88.849,89.774 U1.7@88.856,89.781
  Bottom Layer w0.3: X1.A27@58.5,89 58.5,89.388 60.111,91 73.432,91 73.779,90.653 v1(73.835,90.653)
GND: C1.2 C2.1 C3.1 C4.1 C5.1 C6.1 C7.1 C8.1 C9.1 C10.1 C11.1 C12.2 C13.2 C14.1 C15.1 C16.1 C17.1 C18.2 C19.2 C20.1 C21.1 C22.1 C23.1 C24.1 C25.1 C26.1 C27.1 C28.1 R5.1 R6.1 R8.1 R12.1 R13.1 R15.1 R19.1 R20.1 R22.1 R26.1 R27.1 R29.1 R33.1 R34.1 R36.1 R40.1 R41.1 R43.1 R47.1 R48.1 R50.1 R54.1 R55.1 R57.1 R58.1 R59.1 R60.1 R61.1 R62.1 R63.1 R64.1 R65.1 R69.1 U1.2 U1.8 U2.1 U3.4 U4.4 U5.4 U6.4 U7.4 U8.4 U9.4 U10.4 U11.1 U11.10 U12.1 U12.10 U13.10 U13.40 X1.A7 X1.A11 X1.A12 X1.A13 X1.A14 X1.A15 X1.A16 X1.A19 X1.A20 X1.A21 X1.A22 X1.A23 X1.A24 X1.A33 X2.3 X2.5 | length 4.2
  Top Layer w0.3: U13.40@45.634,11.622 47.224,11.622 47.246,11.644 ; 54.619,12.154 54.651,12.122 U13.10@57.134,12.122
  Bottom Layer w0.3: v1@60.774,34.792 v1@60.779,34.792
  other v1: 60.774,34.791
JTAG_RST: R66.1 U13.63 X2.10 | length 27
  Top Layer w0.3: U13.63@54.634,5.622 54.634,4.521 55.143,4.012 62.115,4.012 62.278,4.176 68.303,4.176 X2.10@68.466,4.176 68.42,4.176 67.543,5.053 67.543,6.137 68.368,6.962 75.116,6.962 75.447,6.63 R66.1@76.513,6.63
JTAG_TCLK: U13.62 X2.4 | length 22.1
  Top Layer w0.3: U13.62@54.134,5.622 54.134,4.381 54.956,3.559 65.495,3.559 66.926,2.128 71.785,2.128 72.276,2.619 X2.4@72.276,4.176
JTAG_TDI: U13.61 X2.8 | length 19.3
  Top Layer w0.3: U13.61@53.634,5.622 53.634,4.241 54.768,3.107 64.953,3.107 v1(65.057,3.003)
  Bottom Layer w0.3: v1(65.057,3.003) 66.675,3.003 66.848,2.83 67.024,2.654 69.126,2.654 69.624,3.152 69.624,4.064 X2.8@69.736,4.176
JTAG_TDO: U13.58 X2.6 | length 24
  Top Layer w0.3: U13.58@52.134,5.622 52.134,4.497 53.977,2.655 64.194,2.655 65.295,1.553 70.534,1.553 v1(70.738,1.349)
  Bottom Layer w0.3: v1(70.738,1.349) 70.778,1.389 70.778,1.536 70.809,1.567 70.809,3.7 70.891,3.782 70.891,4.061 X2.6@71.006,4.176
JTAG_TMS: R67.1 U13.64 X2.2 | length 25
  Top Layer w0.3: U13.64@55.134,5.622 55.134,4.66 55.331,4.464 59.711,4.464 60.063,4.816 66.417,4.816 v1(66.445,4.844) ; v1(66.963,3.613) 67.964,3.613 68.425,3.152 71.233,3.152 v1(71.547,2.838) ; X2.2@73.546,4.176 75.193,4.176 75.406,4.388 76.424,4.388 R67.1@76.513,4.477
  Bottom Layer w0.3: v1(66.445,4.844) 66.963,4.326 v1(66.963,3.613) ; v1(71.547,2.838) 73.055,2.838 73.492,3.276 73.492,4.122 X2.2@73.546,4.176
NetC4_2: C4.2 U3.3 | length 3.5
  Bottom Layer w0.3: U3.3@66.079,31.057 68.093,31.057 68.269,30.881 C4.2@68.269,29.674
NetC5_2: C5.2 U4.3 | length 2.3
  Bottom Layer w0.3: C5.2@35.688,31.963 35.805,31.846 U4.3@37.921,31.846
NetC6_2: C6.2 U5.3 | length 3.3
  Bottom Layer w0.3: U5.3@66.079,42.057 67.887,42.057 68.269,41.675 C6.2@68.269,40.674
NetC7_2: C7.2 U6.3 | length 2.3
  Bottom Layer w0.3: C7.2@35.688,42.963 35.805,42.846 U6.3@37.921,42.846
NetC8_2: C8.2 U7.3 | length 2.3
  Bottom Layer w0.3: U7.3@66.079,53.057 67.021,53.057 67.131,52.947 67.442,52.637 C8.2@68.25,52.637
NetC9_2: C9.2 U8.3 | length 2.3
  Bottom Layer w0.3: C9.2@35.688,53.963 35.805,53.846 U8.3@37.921,53.846
NetC10_2: C10.2 U9.3 | length 2.8
  Bottom Layer w0.3: U9.3@59.364,69.373 59.364,71.05 59.687,71.373 C10.2@60.362,71.373
NetC11_2: C11.2 U10.3 | length 2
  Bottom Layer w0.3: U10.3@39.908,69.373 39.908,70.077 40.247,70.416 40.247,70.953 C11.2@40.469,71.174
NetC14_2: C14.2 U11.2 | length 3
  Top Layer w0.3: U11.2@84.703,20.991 84.703,18.2 C14.2@84.844,18.059
NetC15_2: C15.2 U11.4 | length 3
  Top Layer w0.3: U11.4@87.243,20.991 87.243,18.156 C15.2@87.34,18.059
NetC16_2: C16.2 U11.6 | length 3
  Top Layer w0.3: U11.6@89.783,20.991 89.783,18.111 C16.2@89.835,18.059
NetC17_2: C17.2 U11.8 | length 2.9
  Top Layer w0.3: U11.8@92.323,20.991 92.323,18.067 C17.2@92.331,18.059
NetC20_2: C20.2 U12.2 | length 3
  Bottom Layer w0.3: C20.2@19.396,15.752 19.537,15.893 U12.2@19.537,18.684
NetC21_2: C21.2 U12.4 | length 3
  Bottom Layer w0.3: C21.2@16.9,15.752 16.997,15.849 U12.4@16.997,18.684
NetC22_2: C22.2 U12.6 | length 3
  Bottom Layer w0.3: C22.2@14.404,15.752 14.457,15.804 U12.6@14.457,18.684
NetC23_2: C23.2 U12.8 | length 2.9
  Bottom Layer w0.3: C23.2@11.909,15.752 11.917,15.76 U12.8@11.917,18.684